# Altium PCB PCB.PcbDoc
Units mm, origin at the board's own origin, x right, y up, seen from the top; angles counter-clockwise.
Board outline 152.4 x 101.6 mm, 2 copper layers (Top Layer, Bottom Layer); 58 components, 46 nets, 231 pads, 99 vias.
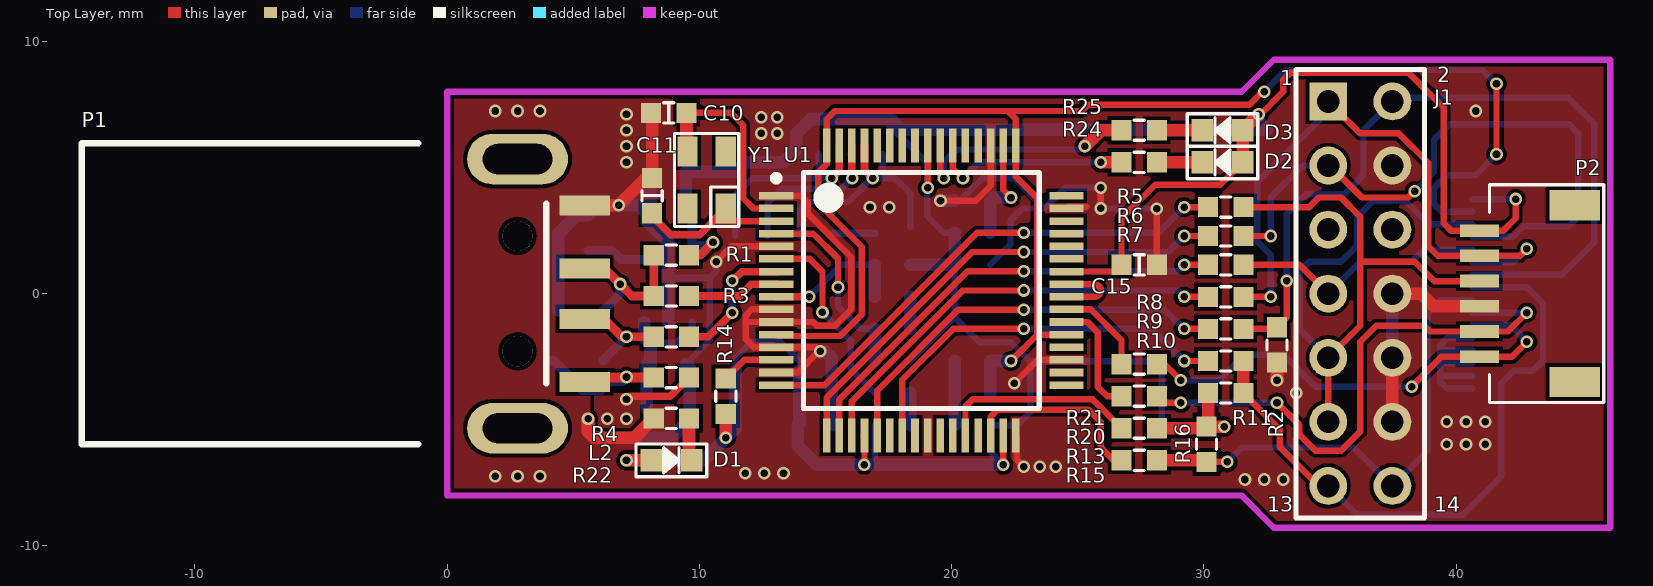
[diagram p0: Top Layer view]
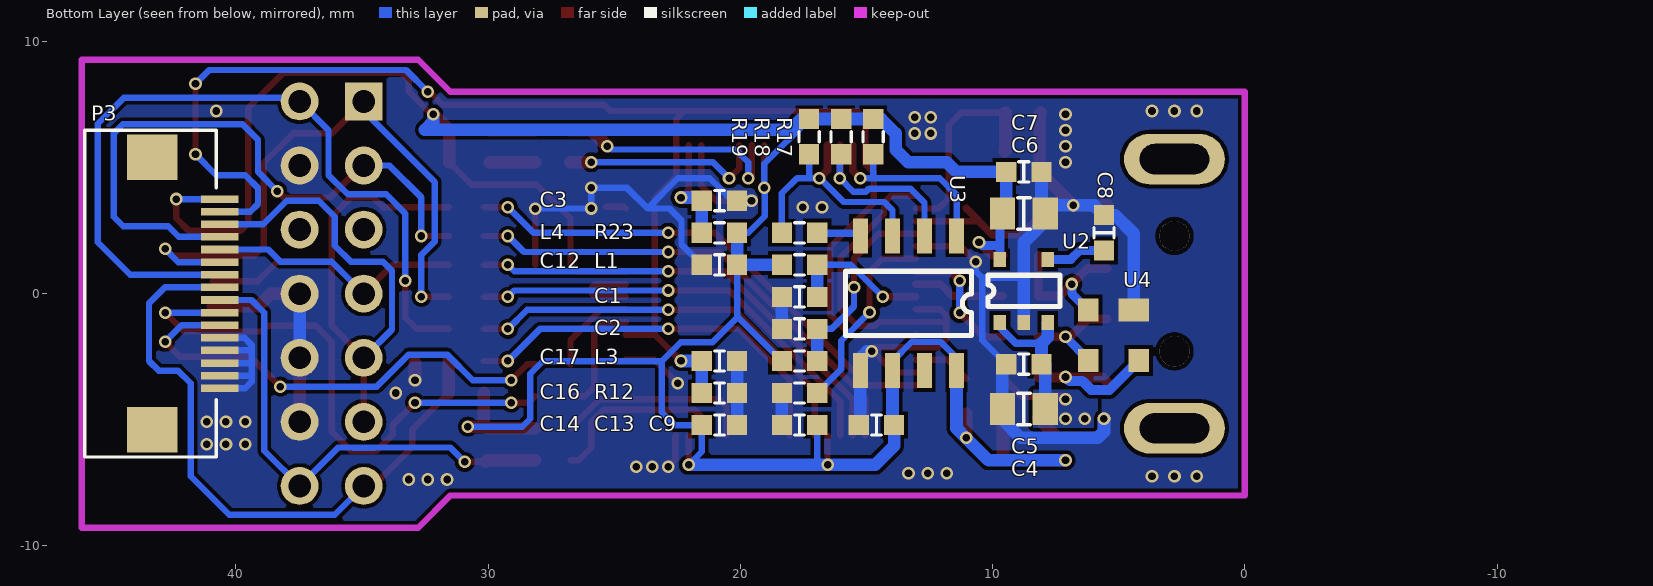
[diagram p1: Bottom Layer view, seen from below]

## Layer stack, top to bottom
Top Solder: solder mask 0.0102, Solder Resist, Dk 3.5
Top Layer: signal copper 0.0356
Dielectric1: dielectric 0.32, FR-4, Dk 4.8
Bottom Layer: signal copper 0.0356
Bottom Solder: solder mask 0.0102, Solder Resist, Dk 3.5

## Board outline
-302.895,-72.39 -150.495,-72.39 -150.495,29.21 -302.895,29.21

## Design rules (kind name [scope] priority, off if disabled: settings)
Clearance [All] p1: gap=0.152
FabricationTestpoint [(IsPad And (OnTopLayer Or OnBottomLayer))] p1: side=3 testpointundercomponent=TRUE minsize=1.016 maxsize=2.54 preferedsize=1.524 minholesize=0 maxholesize=1.016 preferedholesize=0.813 testpointgrid=0.025 allowsidetop=TRUE allowsidebottom=TRUE usegrid=TRUE gridtolerance=0
PolygonConnect [All] p1: connectstyle=Direct reliefconductorwidth=0.254 reliefentries=4 polygonreliefangle="90 Angle" airgapwidth=0.254
RoutingVias [All] p1: holewidth=0.711 width=1.27 viastyle="Through Hole" minholewidth=0.2 minwidth=0.3 maxholewidth=0.711 maxwidth=1.27
SolderMaskExpansion [All] p1: expansion=0.102
Width [All] p1: maxlimit=2.54 minlimit=0.152 preferedwidth=0.254
29 further rules are at their usual default settings.

## Components (designator, comment, footprint, x,y, rotation, side; value= is the part's Value field where it differs from the comment)
C1 "Cap" C0603 17.653,-0.127 r180 bottom
C2 "Cap" C0603 17.653,-1.397 r0 bottom
C3 "Cap" C0603 20.828,3.683 r0 bottom
C4 "Cap Pol1" C0805 8.763,-4.572 r0 bottom
C5 "Cap" C0603 8.763,-2.794 r180 bottom
C6 "Cap Pol1" C0805 8.763,3.175 r180 bottom
C7 "Cap" C0603 8.763,4.826 r0 bottom
C8 "Cap" C0603 5.588,2.413 r270 bottom
C9 "Cap" C0603 14.605,-5.207 r0 bottom
C10 "Cap" C0603 8.788,7.163 r180 top
C11 "Cap" C0603 8.128,3.886 r90 top
C12 "Cap" C0603 20.828,1.143 r0 bottom
C13 "Cap" C0603 17.653,-5.207 r0 bottom
C14 "Cap" C0603 20.828,-5.207 r180 bottom
C15 "Cap" C0603 27.432,1.143 r0 top
C16 "Cap" C0603 20.828,-3.937 r180 bottom
C17 "Cap" C0603 20.828,-2.667 r180 bottom
D1 "LED0" 0603D 8.89,-6.604 r0 top
D2 "LED0" 0603D 30.734,5.207 r180 top
D3 "LED0" 0603D 30.734,6.477 r180 top
J1 "JTAG" HDR2X7 34.925,7.62 r270 top
L1 "Inductors" r0603 17.653,1.143 r180 bottom
L2 "Inductors" r0603 8.89,-3.328 r0 top
L3 "Inductors" r0603 17.653,-2.667 r180 bottom
L4 "Inductors" r0603 20.828,2.413 r0 bottom
P1 "USB" usb 5.461,0 r0 top locked
P2 "Header 6" "1.0*6PIN/SMD H" 42.799,0 r270 top
P3 "Header 16" 0.5MMFPC_16P 43.307,0 r270 bottom
R1 "Res1" R0603 8.89,1.524 r180 top
R2 "Res1" R0603 32.893,-2.032 r90 top
R3 "Res1" R0603 8.89,-0.093 r180 top
R4 "Res1" R0603 8.89,-1.71 r180 top
R5 "Res1" R0603 30.861,3.429 r180 top
R6 "Res1" R0603 30.861,2.286 r180 top
R7 "Res1" R0603 30.861,1.143 r180 top
R8 "Res1" R0603 30.861,-0.127 r180 top
R9 "Res1" R0603 30.861,-1.397 r180 top
R10 "Res1" R0603 30.861,-2.667 r180 top
R11 "Res1" R0603 30.861,-3.937 r0 top
R12 "Res1" R0603 17.653,-3.937 r0 bottom
R13 "Res1" R0603 27.432,-5.334 r180 top
R14 "Res1" R0603 11.049,-4.064 r270 top
R15 "Res1" R0603 27.432,-6.604 r180 top
R16 "Res1" R0603 30.099,-5.969 r270 top
R17 "Res1" R0603 14.732,6.223 r270 bottom
R18 "Res1" R0603 16.002,6.223 r90 bottom
R19 "Res1" R0603 17.272,6.223 r90 bottom
R20 "Res1" R0603 27.432,-4.064 r180 top
R21 "Res1" R0603 27.432,-2.794 r180 top
R22 "Res1" R0603 8.89,-4.945 r180 top
R23 "Res1" R0603 17.653,2.413 r180 bottom
R24 "Res1" R0603 27.432,5.207 r180 top
R25 "Res1" R0603 27.432,6.477 r180 top
U1 "FT2232H" LQFP64 18.796,0.127 r0 top
U2 "SP6205EM5-3.3" SOT-23-5 9.713,-1.143 r90 bottom
U3 "IS93C46D" SO8 13.335,-0.381 r0 bottom
U4 "PSR05" SOT143 5.207,-1.651 r0 bottom
Y1 "XTAL(3225)" Y3225 11.049,3.429 r180 top

## Footprints (in the part's own frame and the unit in brackets; to place one, negate y for a bottom-side part, rotate by r counter-clockwise, add the part's x,y. Pads: shape width x height; smd on the part's side, far side on the other; paste and mask are expansions set on the pad)
0.5MMFPC_16P [mm]
  rect 1.8x2 smd: 0(-5.4,0) 0(5.4,0)
  rect 0.3x1.5 smd: 1(-3.75,2.675) 2(-3.25,2.675) 3(-2.75,2.675) 4(-2.25,2.675) 5(-1.75,2.675) 6(-1.25,2.675) 7(-0.75,2.675) 8(-0.25,2.675) 9(0.25,2.675) 10(0.75,2.675) 11(1.25,2.675) 12(1.75,2.675) 13(2.25,2.675) 14(2.75,2.675) 15(3.25,2.675) 16(3.75,2.675)
  silkscreen extent -6.48,-2.67 6.48,2.54
"1.0*6PIN/SMD H" [mm]
  rect 0.5x1.55 smd: 1(-2.5,-1.887) 2(-1.5,-1.887) 3(-0.5,-1.887) 4(0.5,-1.887) 5(1.5,-1.887) 6(2.5,-1.887)
  rect 1.2x2 smd: 7(-3.5,1.887) 8(3.5,1.887)
  silkscreen extent -4.32,-1.49 4.32,3.05
0603D [mm]
  rect 0.85x0.9 smd: 1(-0.8,0) 2(0.8,0)
  silkscreen extent -1.4,-0.65 1.4,0.65, body extent -0.85,-0.4 0.77,0.4, height 1.1
C0603 [mm] "C0603"
  rect 0.8x0.8 smd: 1(-0.7,0) 2(0.7,0)
  silkscreen extent -0.2,-0.4 0.2,0.4, body extent -0.75,-0.4 0.85,0.4, height 0.6
C0805 [mm] "C0805"
  rect 1x1.27 smd: 1(-0.85,0) 2(0.85,0)
  silkscreen extent -0.25,-0.62 0.25,0.62
HDR2X7 [mm] "Connector; Header; 7x2 Position"
  rect 1.5x1.5 hole 0.9: 1(0,0)
  round 1.5 hole 0.9: 2(0,2.54) 3(2.54,0) 4(2.54,2.54) 5(5.08,0) 6(5.08,2.54) 7(7.62,0) 8(7.62,2.54) 9(10.16,0) 10(10.16,2.54) 11(12.7,0) 12(12.7,2.54) 13(15.24,0) 14(15.24,2.54)
  silkscreen extent -1.27,-1.27 16.51,3.81
LQFP64 [mm] "LQFP, 64-Leads, Body 10.00x10.00mm, Pitch 0.50mm, IPC Medium Density"
  rect 1.35x0.3 smd: 1(-5.75,3.75) 2(-5.75,3.25) 3(-5.75,2.75) 4(-5.75,2.25) 5(-5.75,1.75) 6(-5.75,1.25) 7(-5.75,0.75) 8(-5.75,0.25) 9(-5.75,-0.25) 10(-5.75,-0.75) 11(-5.75,-1.25) 12(-5.75,-1.75) 13(-5.75,-2.25) 14(-5.75,-2.75) 15(-5.75,-3.25) 16(-5.75,-3.75) 33(5.75,-3.75) 34(5.75,-3.25) 35(5.75,-2.75) 36(5.75,-2.25) 37(5.75,-1.75) 38(5.75,-1.25) 39(5.75,-0.75) 40(5.75,-0.25) 41(5.75,0.25) 42(5.75,0.75) 43(5.75,1.25) 44(5.75,1.75) 45(5.75,2.25) 46(5.75,2.75) 47(5.75,3.25) 48(5.75,3.75)
  rect 0.3x1.35 smd: 17(-3.75,-5.75) 18(-3.25,-5.75) 19(-2.75,-5.75) 20(-2.25,-5.75) 21(-1.75,-5.75) 22(-1.25,-5.75) 23(-0.75,-5.75) 24(-0.25,-5.75) 25(0.25,-5.75) 26(0.75,-5.75) 27(1.25,-5.75) 28(1.75,-5.75) 29(2.25,-5.75) 30(2.75,-5.75) 31(3.25,-5.75) 32(3.75,-5.75) 49(3.75,5.75) 50(3.25,5.75) 51(2.75,5.75) 52(2.25,5.75) 53(1.75,5.75) 54(1.25,5.75) 55(0.75,5.75) 56(0.25,5.75) 57(-0.25,5.75) 58(-0.75,5.75) 59(-1.25,5.75) 60(-1.75,5.75) 61(-2.25,5.75) 62(-2.75,5.75) 63(-3.25,5.75) 64(-3.75,5.75)
  silkscreen extent -5.87,-4.67 4.68,4.67, body extent -5,-5 5,5, height 1.6
r0603 [mm] "R0603"
  rect 0.8x0.8 smd: 1(-0.7,0) 2(0.7,0)
  silkscreen extent -0.2,-0.4 0.2,0.4, body extent -0.75,-0.4 0.85,0.4, height 0.6
R0603 [mm] "R0603"
  rect 0.8x0.8 smd: 1(-0.7,0) 2(0.7,0)
  silkscreen extent -0.2,-0.4 0.2,0.4, body extent -0.75,-0.4 0.85,0.4, height 0.6
SO8 [mm] "Small Outline; 8 Leads; Body Width 3.9 mm; Pitch 1.27 mm"
  rect 0.6x1.4 smd: 1(-1.905,-2.667) 2(-0.635,-2.667) 3(0.635,-2.667) 4(1.905,-2.667) 5(1.905,2.667) 6(0.635,2.667) 7(-0.635,2.667) 8(-1.905,2.667)
  silkscreen extent -2.5,-1.27 2.5,1.27
SOT143 [mm]
  rect 1.2x0.9 smd: 1(-0.8,-1)
  rect 0.8x0.9 smd: 2(1,-1) 3(1,1) 4(-1,1)
SOT-23-5 [mm]
  rect 0.6x0.5 smd: 1(0,0) 2(0,-0.95) 3(0,-1.9) 4(2.5,-1.9) 5(2.5,0)
  silkscreen extent 0.63,-2.38 1.87,0.48, body extent 0.25,-2.45 2.25,0.6, height 0.51
usb [mm]
  oval 4x2 hole 1.2 slot 2.75 at 0 deg: 0(-2.667,-5.334) 0(-2.667,5.334)
  round 1.2 hole 1.2: 0(-2.667,-2.286) 0(-2.667,2.286)
  rect 2x0.8 smd: 1(0,-3.5) 2(0,-1) 3(0,1) 4(0,3.5)
  silkscreen extent -19.94,-5.97 -1.52,5.97
Y3225 [mm]
  rect 0.8x1.2 smd: 1(0,0.051) 2(0,-2.21) 3(1.524,-2.21) 4(1.524,0.051)
  silkscreen extent -0.51,-2.92 2.03,0.76

## Part data
C1 C2 C3 C5 C7 C8 C9 C10 C11 C12 C13 C14 C15 C16 C17: "Capacitor"
C4 C6: "Polarized Capacitor (Radial)"
D1 D2 D3: "Typical INFRARED GaAs LED"
P2: "Header, 6-Pin"
P3: "Header, 16-Pin"
R1 R2 R3 R4 R5 R6 R7 R8 R9 R10 R11 R12 R13 R14 R15 R16 R17 R18 R19 R20 R21 R22 R23 R24 R25: "Resistor"
U2: library part SP6205, "AD3330"
Y1: "Crystal Oscillator"

## Via types
v1: diameter 0.5, hole 0.3, Top Layer to Bottom Layer, 99 vias

## Nets (pads, with @x,y where several pads share a name; then routed paths per layer and width w, separated by ;. In a path a pad name is that pad's centre, name@x,y a point inside that pad or via, vN(x,y) a via of type N, cw(c..) or ccw(c..) an arc to the next point about the centre after c; other vN are vias at no path point)
1.8V: C16.1 C17.1 P3.2 U1.12 U1.37 U1.49 U1.64 | length 62.1
  Top Layer w0.254: U1.12 13.101,-1.678 15.58,-1.678 16.43,-0.829 16.43,1.858 14.711,3.577 14.711,4.805 15.046,5.14 U1.64 15.046,6.918 15.367,7.239 22.225,7.239 ; v1(22.352,-2.667) 23.389,-1.63 ; U1.37 23.396,-1.623 23.389,-1.63 ; v1(32.385,8.001) 32.309,8.001 31.801,7.493 25.4,7.493 25.146,7.239 22.225,7.239 ; v1(41.593,5.524) v1(41.593,8.319) ; 22.225,7.239 22.546,6.918 U1.49 22.546,4.632 23.389,3.789 23.389,-1.63
  Bottom Layer w0.254: v1(32.385,8.001) 33.249,8.865 41.046,8.865 v1(41.593,8.319) ; P3.2 39.422,3.25 39.116,3.556 39.116,4.191 39.624,4.699 40.767,4.699 v1(41.593,5.524)
  Bottom Layer w0.5: C16.1 C17.1 v1(22.352,-2.667)
3.3V: C6.1 C7.2 C9.1 C12.1 C13.1 C14.1 C15.1 D1.1 D2.1 D3.1 L1.1 L3.1 L4.1 P2.1 P3.1 R1.1 R11.1 R13.1 R14.2 R16.1 R17.1 R18.2 R19.2 U1.20 U1.31 U1.42 U1.56 U2.5 U3.6 U3.8 | length 128.5
  Top Layer w0.254: U1.20@16.51,-5.659 U1.20 16.546,-6.771 v1(16.535,-6.782) ; v1(19.046,4.195) U1.56 ; v1(22.046,-6.783) U1.31 ; U1.42 26.466,0.877 C15.1 26.732,2.983 28.067,4.318 30.645,4.318 D2.1 ; v1(32.169,7.112) 32.245,7.112 33.147,8.014 33.147,8.484 33.426,8.763 38.1,8.763 39.497,7.366 39.497,2.794 39.791,2.5 P2.1 41.87,2.5 42.358,2.988 v1(42.358,3.75)
  Top Layer w0.35: R1.1 10.033,1.524 v1(10.541,2.032)
  Top Layer w0.5: v1(7.112,-6.604) D1.1 ; v1(11.049,-5.715) R14.2 ; R13.1 30.034,-5.334 R16.1 ; R11.1 30.161,-5.207 R16.1 ; v1(30.796,-5.269) R16.1 ; D2.1 D3.1 v1(32.169,7.112)
  Bottom Layer w0.254: U3.8 11.43,-2.54 12.065,-1.905 13.208,-1.905 U3.6@13.97,-2.667 ; C13.1 16.953,-6.718 17.018,-6.783 ; R19.2 19.046,5.149 v1(19.046,4.195) 19.029,4.178 19.029,3.069 19.685,2.413 L4.1 ; L3.1 20.098,-0.921 ; C12.1 20.128,-0.951 21.103,-1.926 22.36,-1.926 23.114,-2.68 ; v1(22.046,-6.783) 21.528,-6.265 C14.1 22.606,-5.207 23.114,-4.699 23.114,-2.68 ; v1(30.796,-5.269) 28.637,-5.269 28.321,-4.953 28.321,-3.175 27.826,-2.68 23.114,-2.68 ; P3.1 v1(42.358,3.75)
  Bottom Layer w0.35: C6.1 9.713,3.075 9.713,1.905 ; U2.5 9.713,1.905 ; v1(10.541,2.032) 10.414,1.905 9.713,1.905
  Bottom Layer w0.5: v1(7.112,-6.604) 10.16,-6.604 v1(11.049,-5.715) 11.43,-5.334 U3.8 ; C6.1 9.463,3.325 C7.2 11.43,4.826 11.811,5.207 13.335,5.207 13.843,5.715 13.843,6.35 14.416,6.923 R17.1 R18.2 R19.2 17.588,6.923 18.017,6.494 32.495,6.494 32.169,6.82 v1(32.169,7.112) ; U3.6 13.97,-5.142 C9.1 13.905,-6.031 14.657,-6.783 17.018,-6.783 v1(22.046,-6.783) ; L1.1 C12.1 L4.1
5V: C4.1 C5.2 L2.2 U2.1 U2.3 | length 8.5
  Top Layer w0.3: v1(7.112,-4.191) 7.239,-4.064 8.854,-4.064 L2.2
  Bottom Layer w0.3: 8.063,-1.967 9.082,-1.967 9.713,-1.336 U2.1
  Bottom Layer w0.5: U2.3 7.813,-1.717 8.063,-1.967 C5.2 ; C4.1 C5.2@7.913,-2.794
  other v1: 6.35,-4.953 7.112,-4.953
DM: R4.1 U1.7 | length 5.3
  Top Layer w0.3: R4.1 10.355,-1.71 v1(11.303,-0.762) ; v1(11.303,0.508) 11.672,0.877 U1.7
  Bottom Layer w0.3: v1(11.303,-0.762) v1(11.303,0.508)
DP: R3.1 U1.8 | length 3.7
  Top Layer w0.3: R3.1 11.591,-0.093 12.061,0.377 U1.8
EECLK: R18.1 U1.62 U3.2 | length 7.5
  Top Layer w0.3: v1@16.046,4.572 U1.62
  Bottom Layer w0.254: U3.2 12.7,3.607 13.259,4.166 14.898,4.166 15.021,4.043 15.523,4.043 v1(16.053,4.572) 16.053,5.472 R18.1
EECS: R17.2 U1.63 U3.1 | length 8.1
  Top Layer w0.3: v1(15.24,4.572) 15.546,4.878 U1.63
  Bottom Layer w0.254: U3.1 11.43,3.912 12.09,4.572 14.732,4.572 ; R17.2 14.732,4.572 ; v1(15.24,4.572) 14.732,4.572
EEDATA: R19.1 R23.1 U1.61 U3.3 | length 9.9
  Top Layer w0.3: U1.61 16.546,4.892 v1(16.866,4.572)
  Bottom Layer w0.254: U3.3 13.97,3.302 14.3,3.632 15.9,3.632 16.84,4.572 v1(16.866,4.572) 17.31,4.572 ; R19.1 17.272,4.61 17.31,4.572 ; R23.1@18.353,2.642 18.353,3.974 17.755,4.572 17.31,4.572
GND: C1.1 C2.2 C3.1 C4.2 C5.1 C6.2 C7.1 C8.1 C9.2 C10.2 C11.2 C12.2 C13.2 C14.2 C15.2 C16.2 C17.2 J1.4 J1.8 J1.10 J1.12 P1.4 P2.4 P3.12 P3.13 P3.14 P3.15 P3.16 R2.1 R12.2 R22.2 U1.1 U1.5 U1.10 U1.11 U1.13 U1.15 U1.25 U1.32 U1.35 U1.47 U1.51 U2.2 U3.5 U4.1 | length 108.8
  Top Layer w0.254: v1(10.668,1.27) 11.275,1.877 U1.5 ; U1.15 13.895,-3.123 14.732,-2.286 v1(14.795,-2.286) 14.633,-2.123 U1.13 12.156,-2.123 11.832,-1.799 11.832,-1.143 ; U1.10 12.077,-0.623 11.832,-0.868 11.832,-1.143 ; U1.1 14.03,3.877 14.304,3.603 14.304,3.162 16.023,1.442 16.023,-0.614 15.365,-1.272 14.659,-1.272 14.51,-1.123 U1.11 11.852,-1.123 11.832,-1.143 ; v1(19.558,3.683) 20.955,3.683 21.546,4.274 U1.51 ; v1(22.479,-3.556) 23.412,-2.623 U1.35 ; U1.32 22.575,-5.652 22.575,-6.573 v1(22.86,-6.858) ; U1.47 24.617,3.448 25.337,3.448 ; v1(25.908,4.191) v1(25.908,3.377) v1@25.983,3.377 ; C15.2 v1(28.132,3.364)
  Top Layer w0.5: P1.4 v1(6.802,3.5) 7.888,4.586 C11.2 8.128,7.123 C10.2 ; v1(5.588,-4.953) 5.588,-5.461 5.842,-5.715 7.42,-5.715 R22.2 ; v1(32.893,-3.429) R2.1 ; J1.12 J1.10 ; J1.8 38.608,0 39.108,-0.5 P2.4
  Bottom Layer w0.254: 8.763,0.635 10.414,0.635 ; C5.1 10.414,-1.843 10.414,0.635 ; v1(10.668,1.27) 10.668,0.889 10.414,0.635 ; C3.1 20.32,3.683 21.209,4.572 22.479,4.572 23.674,3.377 ; C12.2 22.331,1.946 22.331,2.9 22.808,3.377 23.674,3.377 ; v1(28.132,3.364) 28.119,3.377 v1(25.908,3.377) v1(25.908,4.191) 24.488,4.191 23.674,3.377 ; P3.16 39.624,-3.75 39.624,-3.743 39.37,-3.489 39.37,-3.302 ; P3.15 39.422,-3.25 39.37,-3.302 ; P3.14 39.414,-2.75 39.37,-2.794 ; P3.13 39.406,-2.25 39.37,-2.286 ; P3.12 39.652,-1.75 39.37,-2.032 39.37,-2.286 ; 39.37,-3.302 39.37,-2.794 ; 39.37,-2.794 39.37,-2.286
  Bottom Layer w0.5: U4.1 4.407,2.375 5.145,3.113 C8.1 5.975,3.5 v1(6.802,3.5) 7.588,3.5 C6.2 ; v1(5.588,-4.953) 5.588,-5.461 5.842,-5.715 8.89,-5.715 9.613,-4.992 C4.2 9.613,-2.944 C5.1 ; C7.1 8.063,3.325 C6.2 ; U2.2 8.763,0.635 8.763,2.032 7.913,2.882 C6.2 ; v1(14.795,-2.286) 14.986,-2.286 15.24,-2.54 U3.5 15.24,-5.142 C9.2 ; C13.2 R12.2 ; C2.2 C1.1 ; v1(19.558,3.683) C3.1 ; C14.2 C16.2 C17.2 ; J1.10 J1.8
  other v1: 31.623,-7.366 32.385,-7.366 33.147,-7.366 1.905,-7.239 2.794,-7.239 3.683,-7.239 11.811,-7.112 12.573,-7.112 13.335,-7.112 23.495,-6.858 24.13,-6.858 39.624,-5.969 40.386,-5.969 41.148,-5.969 39.624,-5.08 40.386,-5.08 41.148,-5.08 33.655,-3.937 16.764,3.429 17.526,3.429 7.112,5.207 7.112,5.842 12.446,6.35 13.081,6.35 7.112,6.477 12.446,6.985 13.081,6.985 7.112,7.112 1.905,7.239 2.794,7.239 3.683,7.239 40.767,7.239
JTAG_EMU0: J1.13 P3.8 R10.1 R11.2 | length 25.6
  Top Layer w0.254: R11.2 32.995,-5.371 32.995,-6.071 34.544,-7.62 J1.13
  Top Layer w0.5: R11.2 R10.1
  Bottom Layer w0.254: J1.13 36.068,-8.763 40.259,-8.763 41.783,-7.239 41.783,-3.556 42.291,-3.048 43.053,-3.048 43.434,-2.667 43.434,-0.381 42.803,0.25 P3.8
JTAG_EMU1: J1.14 P3.9 R15.1 R16.2 | length 19.7
  Top Layer w0.254: R16.2 v1(30.923,-6.669)
  Top Layer w0.5: R15.1 30.034,-6.604 R16.2
  Bottom Layer w0.254: v1(30.923,-6.669) 31.496,-6.096 34.485,-6.096 34.499,-6.109 35.351,-6.109 35.365,-6.096 35.941,-6.096 J1.14 38.862,-6.223 38.862,-0.762 39.374,-0.25 P3.9
JTAG_TCK: J1.9 J1.11 P2.3 P3.3 R5.1 | length 31.7
  Top Layer w0.254: R5.1 34.163,3.429 34.544,3.81 35.433,3.81 36.195,3.048 36.195,1.27 ; J1.11 J1.9 36.195,-1.27 36.195,1.27 ; P2.3 39.124,0.5 38.354,1.27 36.195,1.27
  Bottom Layer w0.254: J1.9 33.803,-1.418 33.803,0.91 34.163,1.27 35.433,1.27 36.068,1.905 36.068,3.048 36.703,3.683 37.973,3.683 38.906,2.75 P3.3
JTAG_TDI: J1.3 P3.4 R6.1 | length 25.8
  Top Layer w0.254: R6.1 v1(32.639,2.286) ; J1.3 34.992,5.08 36.262,3.81 38.1,3.81 v1(38.354,4.064)
  Bottom Layer w0.254: v1(32.639,2.286) 32.639,3.81 33.909,5.08 J1.3 ; v1(38.354,4.064) 39.116,4.826 39.116,6.096 39.73,6.71 44.471,6.71 44.831,6.35 44.831,3.048 44.45,2.667 42.672,2.667 42.255,2.25 P3.4
JTAG_TDO: J1.7 P3.5 R7.1 | length 10.3
  Top Layer w0.254: R7.1 33.782,1.143 J1.7
  Bottom Layer w0.254: J1.7 36.195,1.27 38.227,1.27 38.707,1.75 P3.5
JTAG_TMS: J1.1 P2.2 P3.6 R8.1 | length 25.1
  Top Layer w0.254: R8.1 v1(32.639,-0.127) ; J1.1 36.195,6.35 37.719,6.35 38.883,5.186 38.883,1.884 39.267,1.5 P2.2 42.521,1.5 v1(42.799,1.778)
  Bottom Layer w0.254: v1(32.639,-0.127) 32.639,1.537 32.11,2.067 32.11,4.424 34.925,7.239 J1.1 ; P3.6 42.271,1.25 v1(42.799,1.778)
JTAG_TRSTN: J1.2 P3.7 R2.2 R9.1 | length 31.7
  Top Layer w0.254: R9.1 32.828,-1.397 R2.2 33.274,-0.951 v1(33.274,0.508)
  Bottom Layer w0.254: v1(33.274,0.508) 33.274,3.175 34.036,3.937 35.56,3.937 36.322,4.699 36.322,6.477 J1.2 37.613,7.768 44.429,7.768 45.466,6.731 45.466,2.032 44.184,0.75 P3.7
NetC1_2: C1.2 L1.2 U1.9 | length 5.7
  Top Layer w0.3: U1.9 14.347,-0.123 v1(14.349,-0.125)
  Bottom Layer w0.254: v1(14.349,-0.125) 14.353,-0.125 15.621,1.143 L1.2
  Bottom Layer w0.5: C1.2 L1.2
NetC2_1: C2.1 L3.2 U1.4 | length 7.9
  Top Layer w0.254: U1.4 14.514,2.377 15.494,1.397 v1(15.494,0.254)
  Bottom Layer w0.254: v1(15.494,0.254) 15.494,-0.508 16.383,-1.397 C2.1
  Bottom Layer w0.5: L3.2 C2.1
NetC3_2: C3.2 L4.2 U1.50 | length 4.5
  Top Layer w0.254: U1.50 22.046,4.116 v1(22.352,3.81) v1@22.352,3.683
  Bottom Layer w0.254: C3.2 C3.2@21.655,3.81
  Bottom Layer w0.5: L4.2 C3.2 ; C3.2@21.655,3.81 v1(22.352,3.81)
NetC8_2: C8.2 U2.4 | length 2.4
  Bottom Layer w0.35: C8.2 6.542,1.713 6.898,1.357 U2.4
NetC10_1: C10.1 U1.2 Y1.3 | length 8.4
  Top Layer w0.254: C10.1 11.252,7.163 11.735,6.68 11.735,3.785 12.142,3.377 U1.2
  Top Layer w0.5: C10.1 9.488,5.675 Y1.3
NetC11_1: C11.1 U1.3 Y1.1 | length 6.2
  Top Layer w0.254: 10.592,2.877 U1.3
  Top Layer w0.3: C11.1 8.128,3.073 8.865,2.337 10.008,2.337 Y1.1
NetD1_2: D1.2 R22.1 | length 1.7
  Top Layer w0.5: R22.1 9.59,-6.504 D1.2
NetD2_2: D2.2 R24.1 | length 1.8
  Top Layer w0.5: R24.1 D2.2
NetD3_2: D3.2 R25.1 | length 1.8
  Top Layer w0.5: R25.1 D3.2
NetR5_2: R5.2 U1.16 | length 20
  Top Layer w0.254: U1.16 14.966,-3.623 21.002,2.413 v1(22.86,2.413) ; v1(29.21,3.429) R5.2
  Bottom Layer w0.254: v1(22.86,2.413) 28.194,2.413 v1(29.21,3.429)
NetR6_2: R6.2 U1.17 | length 19.3
  Top Layer w0.254: U1.17 15.046,-4.118 20.815,1.651 v1(22.86,1.651) ; v1(29.21,2.286) R6.2
  Bottom Layer w0.254: v1(22.86,1.651) 28.575,1.651 v1(29.21,2.286)
NetR7_2: R7.2 U1.18 | length 18.3
  Top Layer w0.254: U1.18 15.546,-4.193 20.628,0.889 v1(22.86,0.889) ; v1(29.21,1.143) R7.2
  Bottom Layer w0.254: v1(22.86,0.889) 28.956,0.889 v1(29.21,1.143)
NetR8_2: R8.2 U1.19 | length 17.4
  Top Layer w0.254: U1.19 16.046,-4.268 20.441,0.127 v1(22.86,0.127) ; v1(29.21,-0.127) R8.2
  Bottom Layer w0.254: v1(22.86,0.127) 28.956,0.127 v1(29.21,-0.127)
NetR9_2: R9.2 U1.21 | length 16.5
  Top Layer w0.254: U1.21 17.046,-3.842 20.253,-0.635 v1(22.86,-0.635) ; v1(29.21,-1.397) R9.2
  Bottom Layer w0.254: v1(22.86,-0.635) 28.448,-0.635 v1(29.21,-1.397)
NetR10_2: R10.2 U1.23 | length 15.7
  Top Layer w0.254: U1.23 18.046,-3.417 20.066,-1.397 v1(22.86,-1.397) ; v1(29.21,-2.667) R10.2
  Bottom Layer w0.254: v1(22.86,-1.397) 27.94,-1.397 v1(29.21,-2.667)
NetR12_1: R12.1 U1.6 | length 7.7
  Top Layer w0.254: U1.6 14.371,1.377 14.878,0.87 v1(14.878,-0.743)
  Bottom Layer w0.254: v1(14.878,-0.743) 16.002,-1.866 16.002,-2.986 R12.1
NetR13_2: R13.2 U1.28 | length 7.9
  Top Layer w0.254: U1.28 20.546,-4.473 20.828,-4.191 25.589,-4.191 R13.2
NetR14_1: R14.1 U1.14 | length 2.3
  Top Layer w0.254: R14.1 11.79,-2.623 U1.14
NetR15_2: R15.2 U1.30 | length 7.5
  Top Layer w0.254: U1.30 21.546,-4.87 21.819,-4.597 25.421,-4.597 25.908,-5.085 25.908,-6.096 26.416,-6.604 R15.2
NetR20_2: R20.2 U1.38 | length 4.6
  Top Layer w0.254: U1.38 25.38,-1.123 25.781,-1.524 25.781,-3.683 26.162,-4.064 R20.2@26.67,-4.064
NetR21_2: R21.2 U1.39 | length 3.6
  Top Layer w0.254: U1.39 25.515,-0.623 26.732,-1.84 R21.2
NetR23_2: R23.2 U3.4 | length 1.7
  Bottom Layer w0.3: U3.4@15.291,2.388 R23.2@16.953,2.388
NetR24_2: R24.2 U1.54 | length 8
  Top Layer w0.254: U1.54 20.046,4.973 v1(20.447,4.572)
  Top Layer w0.5: v1(25.908,5.207) R24.2
  Bottom Layer w0.254: v1(20.447,4.572) 21.082,5.207 v1(25.908,5.207)
NetR25_2: R25.2 U1.55 | length 9.6
  Top Layer w0.254: U1.55 19.546,4.711 v1(19.685,4.572)
  Top Layer w0.5: v1(25.273,5.842) 25.908,6.477 R25.2
  Bottom Layer w0.254: v1(19.685,4.572) 19.685,5.207 20.193,5.715 25.146,5.715 v1(25.273,5.842)
NetU1_40: U1.40 U1.41 | length 3
  Top Layer w0.254: U1.40 25.658,-0.123 ccw(c25.658,0.127) 25.658,0.377 ; U1.41 25.65,0.377
UART_RX: P2.5 P3.10 R20.1 | length 22.5
  Top Layer w0.254: R20.1 28.386,-4.318 v1(29.083,-4.318) ; v1(32.893,-4.318) 33.782,-5.207 33.782,-5.588 34.417,-6.223 35.433,-6.223 36.195,-5.461 36.195,-1.905 36.83,-1.27 38.735,-1.27 38.965,-1.5 P2.5 42.037,-1.5 v1(42.787,-0.75)
  Bottom Layer w0.254: v1(29.083,-4.318) v1(32.893,-4.318) ; P3.10 v1(42.787,-0.75)
UART_TX: P2.6 P3.11 R21.1 | length 19.1
  Top Layer w0.254: R21.1 28.448,-2.794 v1(29.083,-3.429) ; v1(38.227,-3.683) 39.41,-2.5 P2.6 42.204,-2.5 v1(42.799,-1.905)
  Bottom Layer w0.254: v1(29.083,-3.429) 30.607,-3.429 31.623,-2.413 33.147,-2.413 34.417,-3.683 v1(38.227,-3.683) ; P3.11 42.144,-1.25 v1(42.799,-1.905)
USB_5V: L2.1 P1.1 U4.4 | length 6.4
  Top Layer w0.4: P1.1 5.633,-3.328 L2.1
  Bottom Layer w0.4: U4.4 5.366,-3.81 6.096,-3.81 6.453,-3.453 6.961,-3.453 v1(7.112,-3.302)
USB_DM: P1.2 R4.2 U4.3 | length 4.3
  Top Layer w0.35: P1.2 6.207,-1 6.917,-1.71 v1(7.112,-1.71) R4.2
  Bottom Layer w0.35: U4.3 6.207,-2.615 v1(7.112,-1.71)
USB_DP: P1.3 R1.2 R3.2 U4.2 | length 6.1
  Top Layer w0.35: P1.3 6.239,1 v1(6.858,0.381) 7.332,-0.093 R3.2 R1.2
  Bottom Layer w0.35: U4.2 6.858,0 v1(6.858,0.381)
pads on no net: J1.5 J1.6 P1.0 P2.7 P2.8 P3.0 U1.22 U1.24 U1.26 U1.27 U1.29 U1.33 U1.34 U1.36 U1.43 U1.44 U1.45 U1.46 U1.48 U1.52 U1.53 U1.57 U1.58 U1.59 U1.60 U3.7 Y1.2 Y1.4

## Polygon pours and split planes (outlines as drawn)
GND on Bottom Layer "Top Layer-No Net" (solid, remove dead copper, pour order 22): -1.016,9.398 -1.016,-11.557 -0.635,-11.938 -0.508,-12.065 47.752,-12.065 47.752,11.684 47.879,11.811
5V on Bottom Layer "Top Layer-No Net" (solid, remove dead copper, pour order 14): 5.842,-5.715 5.842,-3.81 8.382,-3.81 8.382,-4.826 8.382,-5.715
GND on Top Layer "Top Layer-No Net" (solid, remove dead copper, pour order 30): -1.27,9.779 -0.508,9.017 -0.508,-10.16 49.149,-10.16 51.308,-12.319 50.292,-11.303 50.292,11.176
5V on Top Layer "Top Layer-No Net" (solid, remove dead copper, pour order 24): 5.842,-3.937 5.842,-5.715 7.42,-5.715 7.801,-5.334 7.874,-5.261 7.874,-3.937

## Keep-outs
Keep-Out Layer:
  lines w0.254: 0,-8 0,8 31.495,8 32.766,9.271 46.101,9.271 46.101,-9.271 32.766,-9.271 31.495,-8 0,-8

## Text inside footprints (layer, text, board x,y; h text height)
J1: Top Overlay "13" at 32.512,-8.636 h0.6; Top Overlay "14" at 39.116,-8.636 h0.6; Top Overlay "1" at 33.02,8.255 h0.6; Top Overlay "2" at 39.243,8.382 h0.6